# Altium PCB LVDS.PcbDoc
Units mil, origin at the board's own origin, x right, y up, seen from the top; angles counter-clockwise.
Board outline 6000 x 4000 mil, 2 copper layers (Top Layer, Bottom Layer); 41 components, 84 nets, 238 pads, 0 vias.
Unrouted connection lines stored in the file: 154.
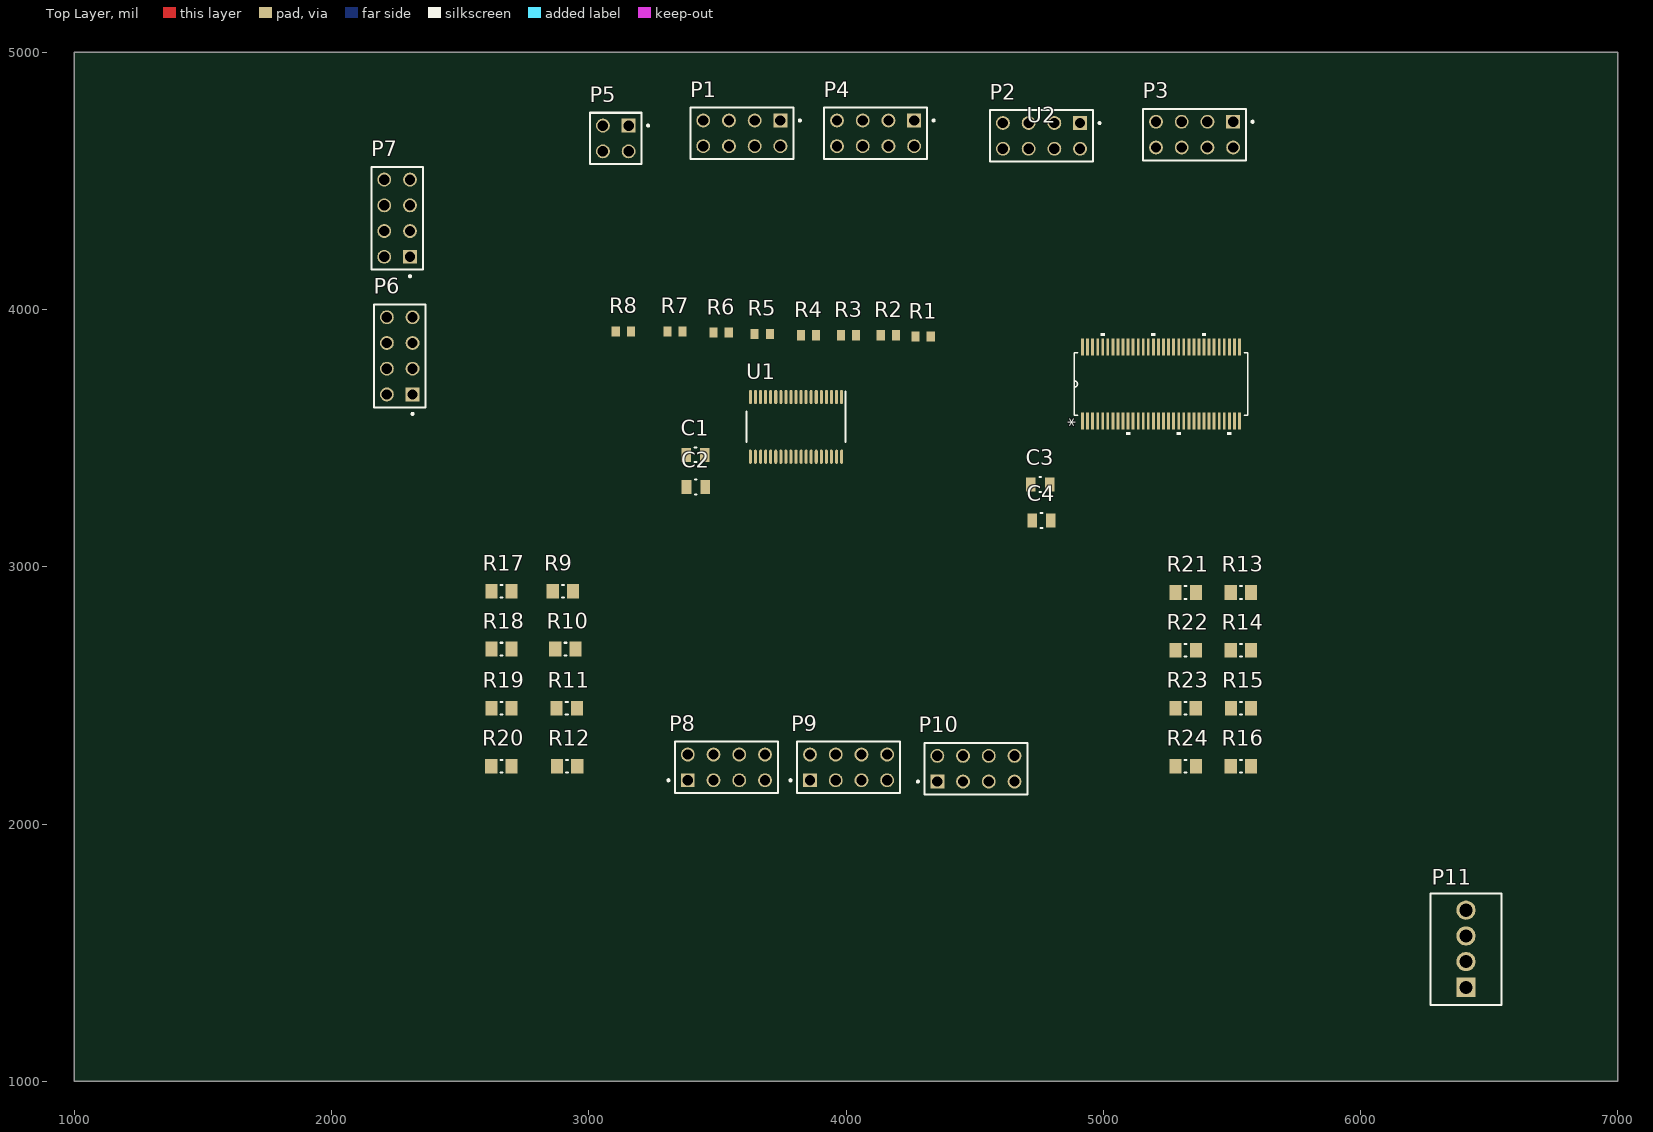
[diagram p0: Top Layer view]
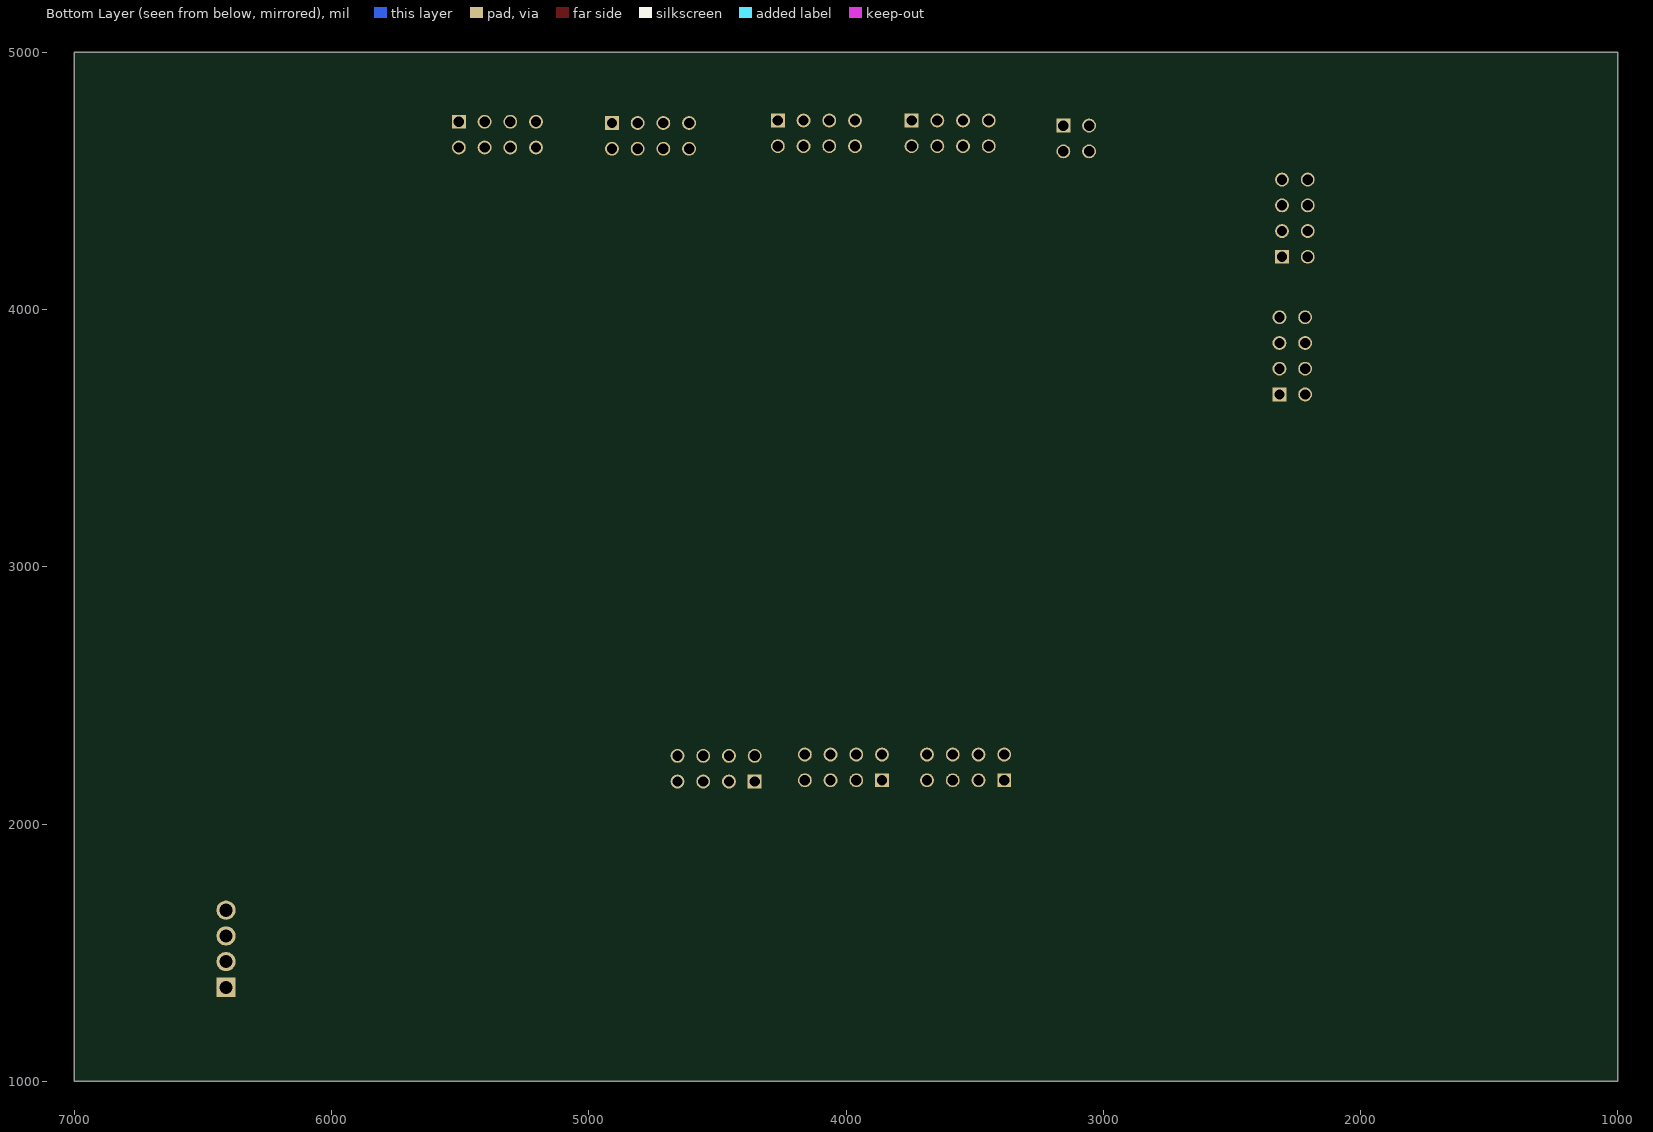
[diagram p1: Bottom Layer view, seen from below]

## Layer stack, top to bottom
Top Solder: solder mask 0.4, Solder Resist, Dk 3.5
Top Layer: signal copper 1.4
Dielectric 1: dielectric 12.6, FR-4, Dk 4.8
Bottom Layer: signal copper 1.4
Bottom Solder: solder mask 0.4, Solder Resist, Dk 3.5

## Board outline
1000,1000 7000,1000 7000,5000 1000,5000

## Design rules (kind name [scope] priority, off if disabled: settings)
Clearance [All] p1: gap=10 ignorepadtopadclearanceinfootprint=FALSE except(0: Arc-Hole Track-Hole SMDPad-Hole THPad-Hole Via-Hole Fill-Hole Poly-Hole Region-Hole Text-Hole)
DiffPairsRouting [All] p1: maxlimit=10 minlimit=10 mostfreqgap=10 toplayer_minwidth=15 toplayer_maxwidth=15 toplayer_prefwidth=15 bottomlayer_minwidth=15 bottomlayer_maxwidth=15 bottomlayer_prefwidth=15 maxuncoupledlength=500
PolygonConnect [All] p1: connectstyle=Relief reliefconductorwidth=10 reliefentries=4 polygonreliefangle="90 Angle" airgapwidth=10
RoutingVias [All] p1: holewidth=28 width=50 viastyle="Through Hole" minholewidth=28 minwidth=50 maxholewidth=28 maxwidth=50
SolderMaskExpansion [All] p1: expansion=4 istentingtop=FALSE
Width [All] p1: maxlimit=10 minlimit=10 preferedwidth=10
29 further rules are at their usual default settings.

## Classes and differential pairs
differential pair TRAN_4: +TRAN_4_P -TRAN_4_N
differential pair TRAN_3: +TRAN_3_P -TRAN_3_N
differential pair TRAN_2: +TRAN_2_P -TRAN_2_N
differential pair TRAN_1: +TRAN_1_P -TRAN_1_N
differential pair REC_4: +REC_4_P -REC_4_N
differential pair REC_3: +REC_3_P -REC_3_N
differential pair REC_2: +REC_2_P -REC_2_N
differential pair REC_1: +REC_1_P -REC_1_N
differential pair M4_SCLK: +M4_SCLK_P -M4_SCLK_N
differential pair M4_MOSI: +M4_MOSI_P -M4_MOSI_N
differential pair M4_MISO: +M4_MISO_P -M4_MISO_N
differential pair M4_CS: +M4_CS_P -M4_CS_N
differential pair M3_SCLK: +M3_SCLK_P -M3_SCLK_N
differential pair M3_MOSI: +M3_MOSI_P -M3_MOSI_N
differential pair M3_MISO: +M3_MISO_P -M3_MISO_N
differential pair M3_CS: +M3_CS_P -M3_CS_N
differential pair M2_SCLK: +M2_SCLK_P -M2_SCLK_N
differential pair M2_MOSI: +M2_MOSI_P -M2_MOSI_N
differential pair M2_MISO: +M2_MISO_P -M2_MISO_N
differential pair M2_CS: +M2_CS_P -M2_CS_N
differential pair M1_SCLK: +M1_SCLK_P -M1_SCLK_N
differential pair M1_MOSI: +M1_MOSI_P -M1_MOSI_N
differential pair M1_MISO: +M1_MISO_P -M1_MISO_N
differential pair M1_CS: +M1_CS_P -M1_CS_N

## Components (designator, comment, footprint, x,y, rotation, side; value= is the part's Value field where it differs from the comment)
C1 "CC0805MRX7R9BB104" FP-CC0805-0_85-MFG 3415,3435 r180 top value="100 nF"
C2 "CC0805KRX7R9BB102" FP-CC0805-0_85-MFG 3416.42,3310 r180 top value="1.0 nF"
C3 "CC0805MRX7R9BB104" FP-CC0805-0_85-MFG 4755,3320 r180 top value="100 nF"
C4 "CC0805KRX7R9BB102" FP-CC0805-0_85-MFG 4760,3180 r180 top value="1.0 nF"
P1 "TSW-104-07-F-D" SAMTEC_TSW-104-07-F-D 3595,4685 r180 top
P2 "TSW-104-07-F-D" SAMTEC_TSW-104-07-F-D 4760,4675 r180 top
P3 "TSW-104-07-F-D" SAMTEC_TSW-104-07-F-D 5355,4680 r180 top
P4 "TSW-104-07-F-D" SAMTEC_TSW-104-07-F-D 4115,4685 r180 top
P5 "0702871098" SAMTEC_MTSW-102-09-G-D-630 3155,4715 r180 top
P6 "TSW-104-07-F-D" SAMTEC_TSW-104-07-F-D 2265,3820 r90 top
P7 "TSW-104-07-F-D" SAMTEC_TSW-104-07-F-D 2255,4355 r90 top
P8 "TSW-104-07-F-D" SAMTEC_TSW-104-07-F-D 3535,2220 r0 top
P9 "TSW-104-07-F-D" SAMTEC_TSW-104-07-F-D 4010,2220 r0 top
P10 "TSW-104-07-F-D" SAMTEC_TSW-104-07-F-D 4505,2215 r0 top
P11 "OSTVN04A150" OSTVN04A150 6410,1365 r90 top
R1 "RC0603FR-07100RL" RESC1608X55X25ML10T15 4300,3895 r0 top
R2 "RC0603FR-07100RL" RESC1608X55X25ML10T15 4164.53,3900 r0 top
R3 "RC0603FR-07100RL" RESC1608X55X25ML10T15 4009.53,3900 r0 top
R4 "RC0603FR-07100RL" RESC1608X55X25ML10T15 3854.53,3900 r0 top
R5 "RC0603FR-07100RL" RESC1608X55X25ML10T15 3674.53,3905 r0 top
R6 "RC0603FR-07100RL" RESC1608X55X25ML10T15 3514.53,3910 r0 top
R7 "RC0603FR-07100RL" RESC1608X55X25ML10T15 3335,3915 r0 top
R8 "RC0603FR-07100RL" RESC1608X55X25ML10T15 3134.53,3915 r0 top
R9 "RC0805JR-070RL" RESC2013X60X35ML10T20 2899.37,2905 r0 top
R10 "RC0805JR-070RL" RESC2013X60X35ML10T20 2909.37,2680 r0 top
R11 "RC0805JR-070RL" RESC2013X60X35ML10T20 2914.37,2450 r0 top
R12 "RC0805JR-070RL" RESC2013X60X35ML10T20 2915.63,2225 r0 top
R13 "RC0805JR-070RL" RESC2013X60X35ML10T20 5535,2900 r0 top
R14 "RC0805JR-070RL" RESC2013X60X35ML10T20 5535,2675 r0 top
R15 "RC0805JR-070RL" RESC2013X60X35ML10T20 5535.63,2450 r0 top
R16 "RC0805JR-070RL" RESC2013X60X35ML10T20 5535,2225 r0 top
R17 "RC0805JR-070RL" RESC2013X60X35ML10T20 2660.63,2905 r0 top
R18 "RC0805JR-070RL" RESC2013X60X35ML10T20 2660.63,2680 r0 top
R19 "RC0805JR-070RL" RESC2013X60X35ML10T20 2660.63,2450 r0 top
R20 "RC0805JR-070RL" RESC2013X60X35ML10T20 2660,2225 r0 top
R21 "RC0805JR-070RL" RESC2013X60X35ML10T20 5320.63,2900 r0 top
R22 "RC0805JR-070RL" RESC2013X60X35ML10T20 5320.63,2675 r0 top
R23 "RC0805JR-070RL" RESC2013X60X35ML10T20 5320,2450 r0 top
R24 "RC0805JR-070RL" RESC2013X60X35ML10T20 5320.63,2225 r0 top
U1 "SN65LVDS388ADBT" DBT0038A_N 3805.63,3543.86 r270 top
U2 "SN75LVDS387DGG" DGG64 5224.53,3710.5 r90 top

## Footprints (in the part's own frame and the unit in brackets; to place one, negate y for a bottom-side part, rotate by r counter-clockwise, add the part's x,y. Pads: shape width x height; smd on the part's side, far side on the other; paste and mask are expansions set on the pad)
DBT0038A_N [mm]
  oval 1.4x0.3 smd paste+0 mask+0: 1(-2.95,4.5) 2(-2.95,4) 3(-2.95,3.5) 4(-2.95,3) 5(-2.95,2.5) 6(-2.95,2) 7(-2.95,1.5) 8(-2.95,1) 9(-2.95,0.5) 10(-2.95,0) 11(-2.95,-0.5) 12(-2.95,-1) 13(-2.95,-1.5) 14(-2.95,-2) 15(-2.95,-2.5) 16(-2.95,-3) 17(-2.95,-3.5) 18(-2.95,-4) 19(-2.95,-4.5) 20(2.95,-4.5) 21(2.95,-4) 22(2.95,-3.5) 23(2.95,-3) 24(2.95,-2.5) 25(2.95,-2) 26(2.95,-1.5) 27(2.95,-1) 28(2.95,-0.5) 29(2.95,0) 30(2.95,0.5) 31(2.95,1) 32(2.95,1.5) 33(2.95,2) 34(2.95,2.5) 35(2.95,3) 36(2.95,3.5) 37(2.95,4) 38(2.95,4.5)
  silkscreen extent -3.5,-4.9 1.5,4.9, body extent -3.2,-4.85 3.2,4.85, height 1.13
DGG64 [mil]
  rect 66x11 smd: 1(-144.5,305.12) 2(-144.5,285.43) 3(-144.5,265.75) 4(-144.5,246.06) 5(-144.5,226.38) 6(-144.5,206.69) 7(-144.5,187.01) 8(-144.5,167.32) 9(-144.5,147.64) 10(-144.5,127.95) 11(-144.5,108.27) 12(-144.5,88.58) 13(-144.5,68.9) 14(-144.5,49.21) 15(-144.5,29.53) 16(-144.5,9.84) 17(-144.5,-9.84) 18(-144.5,-29.53) 19(-144.5,-49.21) 20(-144.5,-68.9) 21(-144.5,-88.58) 22(-144.5,-108.27) 23(-144.5,-127.95) 24(-144.5,-147.64) 25(-144.5,-167.32) 26(-144.5,-187.01) 27(-144.5,-206.69) 28(-144.5,-226.38) 29(-144.5,-246.06) 30(-144.5,-265.75) 31(-144.5,-285.43) 32(-144.5,-305.12) 33(144.5,-305.12) 34(144.5,-285.43) 35(144.5,-265.75) 36(144.5,-246.06) 37(144.5,-226.38) 38(144.5,-206.69) 39(144.5,-187.01) 40(144.5,-167.32) 41(144.5,-147.64) 42(144.5,-127.95) 43(144.5,-108.27) 44(144.5,-88.58) 45(144.5,-68.9) 46(144.5,-49.21) 47(144.5,-29.53) 48(144.5,-9.84) 49(144.5,9.84) 50(144.5,29.53) 51(144.5,49.21) 52(144.5,68.9) 53(144.5,88.58) 54(144.5,108.27) 55(144.5,127.95) 56(144.5,147.64) 57(144.5,167.32) 58(144.5,187.01) 59(144.5,206.69) 60(144.5,226.38) 61(144.5,246.06) 62(144.5,265.75) 63(144.5,285.43) 64(144.5,305.12)
  silkscreen extent -198,-336 198,336, body extent -164,-336 164,337, height 47
FP-CC0805-0_85-MFG [mm]
  rect 0.95x1.4 smd paste+0 mask+0: 1(-0.925,0) 2(0.925,0)
  silkscreen extent -0.08,-0.72 0.08,0.72, body extent -1.6,-1.05 1.6,1.05, height 0.25
OSTVN04A150 [mm] "4 Position Wire to Board Terminal Block Horizontal with Board 0.100\" (2.54mm) Through Hole"
  rect 1.9x1.9 hole 1.3: 1(0,0)
  round 1.9 hole 1.3: 2(2.54,0) 3(5.08,0) 4(7.62,0)
  silkscreen extent -1.75,-3.5 9.25,3.5, body extent -1.47,-3.25 9.09,3.25, height 8.65
RESC1608X55X25ML10T15 [mm] "Chip Resistor, 2-Leads, Body 1.60x0.80mm, IPC Low Density"
  rect 0.8x1 smd: 1(-0.75,0) 2(0.75,0)
  body extent -0.85,-0.45 0.85,0.45, height 0.55
RESC2013X60X35ML10T20 [mm] "Chip Resistor, 2-Leads, Body 2.1x1.35mm, IPC Low Density"
  rect 1.2x1.45 smd: 1(-1,0) 2(1,0)
  silkscreen extent -0.1,-0.63 0.1,0.63, body extent -1.05,-0.68 1.05,0.67, height 0.6
SAMTEC_MTSW-102-09-G-D-630 [mm]
  rect 1.37x1.37 hole 1.02: 1(0,0)
  round 1.37 hole 1.02: 2(0,2.54) 3(2.54,0) 4(2.54,2.54)
  silkscreen extent -2.02,-1.27 3.81,3.81
SAMTEC_TSW-104-07-F-D [mm]
  rect 1.37x1.37 hole 1.02: 1(-3.81,-1.27)
  round 1.37 hole 1.02: 2(-3.81,1.27) 3(-1.27,-1.27) 4(-1.27,1.27) 5(1.27,-1.27) 6(1.27,1.27) 7(3.81,-1.27) 8(3.81,1.27)
  silkscreen extent -5.83,-2.54 5.08,2.54

## Part data
C1 C3: library part CMP-03422-000633-1, "CAP CER 0.1UF 50V X7R 0805", Capacitance="100 nF", Manufacturer=Yageo, Package=CC0805-0.85, Temperature="-30°C to +85°C", Temperature Characteristic=X7R, Temperature Range High=+85°C, Temperature Range Low=-30°C, Tolerance=0.2, Voltage Rating="50 V", Automotive=No, Category=Cap, ComponentLink2Description=Datasheet, ComponentLink2URL=http://www.yageo.com/documents/recent/UPY-GPHC_Y5V_6.3V-to-50V_8.pdf, Device Class L1="Passive Components", Device Class L2=Capacitors, Device Class L3="Ceramic Capacitors", Digikey Description="CAP CER 0.1UF 50V X7R 0805", Footprint Url=http://www.yageo.com/exep/pages/download/literatures/UPY-C_GEN_24.pdf, Height=0.95mm, Ipc Land Pattern Name=CAPC200125X85, Lead Free=Yes, Manufacturer Part Number=CC0805MRX7R9BB104, Material=Ceramic, Mouser Description="Multilayer Ceramic Capacitors MLCC - SMD/SMT 100nF 50V X7R 20%", Octopart=https://octopart.com/cc0805mrx7r9bb104-yageo-30261726, RoHS=TRUE
C2 C4: library part CMP-1036-02978-3, "CAP CER 1000PF 50V X7R 0805", Capacitance="1.0 nF", Manufacturer=Yageo, Package=CC0805-0.85, Temperature="-30°C to +85°C", Temperature Characteristic=X7R, Temperature Range High=+85°C, Temperature Range Low=-30°C, Tolerance=0.1, Voltage Rating="50 V", Automotive=No, Category=Cap, ComponentLink2Description=Datasheet, ComponentLink2URL=http://www.yageo.com/documents/recent/UPY-GPHC_Y5V_6.3V-to-50V_8.pdf, Device Class L1="Passive Components", Device Class L2=Capacitors, Device Class L3="Ceramic Capacitors", Digikey Description="CAP CER 1000PF 50V X7R 0805", Footprint Url=http://www.yageo.com/exep/pages/download/literatures/UPY-C_GEN_24.pdf, Height=0.95mm, Ipc Land Pattern Name=CAPC200125X85, Lead Free=Yes, Manufacturer Part Number=CC0805KRX7R9BB102, Material=Ceramic, Mouser Description="Multilayer Ceramic Capacitors MLCC - SMD/SMT 1.0nF 50V X7R 10%", Octopart=https://octopart.com/cc0805krx7r9bb102-yageo-39467744, RoHS=TRUE
P1 P2 P3 P4 P6 P7 P8 P9 P10: "Board Connector, 8 Contact(s), 2 Row(s), Male, Straight, 0.1 inch Pitch, Solder Terminal, Black Insulator", Flammability Rating="UL94 V-0", Insulation Color=Black, Manufacturer=Samtec, Additional Feature=E.L.P., Body Breadth=0.1inch, Body Depth=0.1inch, Body/Shell Style=RECEPTACLE, Category=Connectors, ComponentLink1Description=https://datasheet.ciiva.com:443/pdfs/VipMasterIC/IC/SAMI/SAMI-S-A0003531373/SAMI-S-A0003531373-1.pdf?src-supplier=IHS+Markit, ComponentLink1URL=https://datasheet.ciiva.com:443/pdfs/VipMasterIC/IC/SAMI/SAMI-S-A0003531373/SAMI-S-A0003531373-1.pdf?src-supplier=IHS+Markit, ComponentLink2Description=https://datasheet.ciiva.com/739/tsw-xxx-xx-xxx-x-xx-xxx-mkt-739906.pdf?src-supplier=Digi-Key, ComponentLink2URL=https://datasheet.ciiva.com/739/tsw-xxx-xx-xxx-x-xx-xxx-mkt-739906.pdf?src-supplier=Digi-Key, Connector Type="BOARD CONNECTOR", Contact Finish - Mating="GOLD FLASH OVER NICKEL (50)", Contact Finish - Termination="Matte Tin (Sn) - with Nickel (Ni) barrier", Contact Gender=Male, Contact Material=Bronze, Contact Pattern=RECTANGULAR, Contact Style="SQ PIN-SKT", DIN Conformance=No, Filter Feature=No, IEC Conformance=No, Insulation Material=Glass, JESD-609 Code=e3, Manufacturer Part Number=TSW-104-07-F-D, Mating Contact Pitch=0.1inch, Mating Contact Row Spacing=0.1inch, Mating Information="MULTIPLE MATING PARTS AVAILABLE", MIL Conformance=No, Mixed Contacts=No, Mounting Style=STRAIGHT, Mounting Technology=Board, Number Of Connectors=1, Number Of Contacts=8, Number Of PCB Rows=2, Number of Rows Loaded=2, Option="General Purpose", PCB Contact Pattern=RECTANGULAR, PCB Contact Row Spacing=5.08mm, Pricing="1=0.9123, 50=0.706, 100=0.5756 (USD)", Reach SVHC Compliant=Yes, Reference Standard=UL, Reliability=COMMERCIAL, RoHS=Yes, RoHS Compliant=Yes, Stock=1, Supplier="Arrow Electronics", Supplier Part Number=TSW-104-07-F-D, Terminal Length=0.1inch, Terminal Pitch=2.54mm, Termination=Solder
P5: "Conn Unshrouded Header HDR 4 POS 2.54mm Solder ST Thru-Hole C-Grid® Bag", Manufacturer=Molex, Supplier Part Number=538-70287-1098, Category=Uncategorized, ComponentLink1Description=https://datasheet.ciiva.com:443/pdfs/VipMasterIC/IC/MOLE/MOLE-S-A0008016477/MOLE-S-A0006766117-1.pdf?src-supplier=IHS+Markit, ComponentLink1URL=https://datasheet.ciiva.com:443/pdfs/VipMasterIC/IC/MOLE/MOLE-S-A0008016477/MOLE-S-A0006766117-1.pdf?src-supplier=IHS+Markit, ComponentLink2Description=https://datasheet.ciiva.com/9470/0702871098-pcb-headers-9470347.pdf?src-supplier=Avnet, ComponentLink2URL=https://datasheet.ciiva.com/9470/0702871098-pcb-headers-9470347.pdf?src-supplier=Avnet, ComponentLink3Description=https://datasheet.ciiva.com/2961/702871098-sd-2961361.pdf?src-supplier=Digi-Key, ComponentLink3URL=https://datasheet.ciiva.com/2961/702871098-sd-2961361.pdf?src-supplier=Digi-Key, Manufacturer Part Number=0702871098, Pricing="1=0.53, 10=0.448, 50=0.448, 100=0.349, 1000=0.274, 10000=0.221 (USD)", Reach SVHC Compliant=Yes, RoHS=Yes, RoHS Compliant=Yes, Stock=14353, Supplier=Mouser
P11: "Barrier Strip Terminal Block, 6A, 1 Row(s), 1 Deck(s)", Current Rating=6A, Manufacturer="On-Shore Technology", Supplier Part Number=ED10563-ND, Voltage Rating=125V, Additional Feature="STANDARD: UL 94V-0, THERMOPLASTIC", Category="Terminal Blocks", ComponentLink1Description=https://datasheet.ciiva.com:443/pdfs/VipMasterIC/IC/ONST/ONSTS00240/ONSTS00114-1.pdf?src-supplier=IHS+Markit, ComponentLink1URL=https://datasheet.ciiva.com:443/pdfs/VipMasterIC/IC/ONST/ONSTS00240/ONSTS00114-1.pdf?src-supplier=IHS+Markit, ComponentLink2Description=https://datasheet.ciiva.com/823/ostvnxxa150-823966.pdf?src-supplier=Digi-Key, ComponentLink2URL=https://datasheet.ciiva.com/823/ostvnxxa150-823966.pdf?src-supplier=Digi-Key, Fastening Method=SCREW, Manufacturer Part Number=OSTVN04A150, Mounting Technology=Board, Number of Decks=1, Number Of Rows=1, Number of Ways=4, Pricing="1=1.39, 10=0.979, 25=0.9128, 50=0.8286, 100=0.8249, 250=0.6966, 500=0.65994, 1000=0.58661, 5000=0.47662 (USD)", Reach SVHC Compliant=Yes, RoHS=Yes, RoHS Compliant=Yes, Safety Approval=UL,CUL, Stock=3152, Supplier=Digi-Key, Terminal and Terminal Block Type="BARRIER STRIP TERMINAL BLOCK", Wire/Cable Gauge=20AWG
R1 R2 R3 R4 R5 R6 R7 R8: library part CMP-2100-03663-1, "Chip Resistor, 100 Ohm, +/- 1%, 0.1 W, -55 to 155 degC, 0603 (1608 Metric), RoHS, Tape and Reel", Case Code (Imperial)=0603, Case Code (Metric)=1608, Manufacturer=Yageo, Max Operating Temperature=155degC, Min Operating Temperature=-55degC, Package Description="2-Pin Surface Mount Device, Body 1.6 x 0.8 mm", Power Rating=100mW, Resistance=100Ohm, Temperature Coefficient=100ppm/degreesC, Tolerance=1%, Voltage Rating=50V, Case/Package=0603, Composition=ThickFilm, Datasheet URL=http://www.yageo.com/NewPortal/yageodocoutput?fileName=/pdf/R-Chip/PYu-RC_Group_51_RoHS_L_5.pdf, Datasheet Version="Rev. 5, 10/2016", Depth=0.8mm, Height=0.45mm, Lead Free=LeadFree, Length=1.6mm, Manufacturer URL=http://www.yageo.com/, Military Standard=Not, Number of Pins=2, Package Reference=0603, Packaging=TapeandReel, REACH SVHC=Unknown, RoHSCompliant=true, Termination=SMD/SMT, Voltage Rating (DC)=50V, Width=0.8mm
R9 R10 R11 R12 R13 R14 R15 R16 R17 R18 R19 R20 R21 R22 R23 R24: library part CMP-2100-03673-1, "Chip Resistor, 0 Ohm, Jumper, +/- 5%, 0.125 W, -55 to 155 degC, 0805 (2012 Metric), RoHS, Tape and Reel", Case Code (Imperial)=0805, Case Code (Metric)=2012, Manufacturer=Yageo, Max Operating Temperature=155degC, Min Operating Temperature=-55degC, Package Description="2-Pin Surface Mounted Device, Body 2 x 1.25 mm", Power Rating=125mW, Resistance=0mOhm, Temperature Coefficient=200ppm/degreesC, Tolerance=5%, Voltage Rating=150V, Case/Package=0805, Composition=ThickFilm, Contact Plating=Tin, Datasheet URL=http://www.yageo.com/NewPortal/yageodocoutput?fileName=/pdf/R-Chip/PYu-RC_Group_51_RoHS_L_5.pdf, Datasheet Version="Rev. 5, 10/2016", Depth=1.25mm, Height=0.5mm, Lead Free=LeadFree, Length=2mm, Manufacturer URL=http://www.yageo.com/, Military Standard=Not, Number of Pins=2, Package Reference=0805, Packaging=TapeandReel, Radiation Hardening=No, REACH SVHC=Unknown, RoHSCompliant=true, Termination=SMD/SMT, Voltage Rating (DC)=150V, Width=1.25mm
U1: "Line Receiver, 8 Func, 8 Rcvr, CMOS, PDSO38", Case/Package=TSSOP, Manufacturer="Texas Instruments", Max Operating Temperature=85°C, Max Supply Current=40mA, Max Supply Voltage=3.6V, Min Operating Temperature=-40°C, Min Supply Voltage=3V, Nominal Supply Voltage=3.3V, Output Low Current-Max=8mA, Package Body Material=Plastic, Package Shape=Rectangular, Package Style="SMALL OUTLINE, THIN PROFILE, SHRINK PITCHMeter", Peak Reflow Temperature (Cel)=260°C, Supplier Part Number=296-6926-5-ND, Temperature Grade=INDUSTRIAL, Category="Interface ICs", Channels=8, ComponentLink1Description=https://www.ti.com:443/lit/ds/symlink/sn65lvds386.pdf?src-supplier=IHS+Markit, ComponentLink1URL=https://www.ti.com:443/lit/ds/symlink/sn65lvds386.pdf?src-supplier=IHS+Markit, ComponentLink2Description=https://datasheet.ciiva.com/1708/sn65lvds386-1708540.pdf?src-supplier=Digi-Key, ComponentLink2URL=https://datasheet.ciiva.com/1708/sn65lvds386-1708540.pdf?src-supplier=Digi-Key, ComponentLink3Description=https://datasheet.ciiva.com/3151/sn65lvds390-3151563.pdf?src-supplier=Avnet, ComponentLink3URL=https://datasheet.ciiva.com/3151/sn65lvds390-3151563.pdf?src-supplier=Avnet, ComponentLink4Description=https://datasheet.ciiva.com/15151/getdatasheetpartid-43449-15151030.pdf?src-supplier=Verical, ComponentLink4URL=https://datasheet.ciiva.com/15151/getdatasheetpartid-43449-15151030.pdf?src-supplier=Verical, ComponentLink5Description=https://datasheet.ciiva.com/1498/1831133-1498284.pdf?src-supplier=Element14, ComponentLink5URL=https://datasheet.ciiva.com/1498/1831133-1498284.pdf?src-supplier=Element14, Differential Output=No, Height - Seated (Max)=1.2mm, Input Characteristics=DIFFERENTIAL, Interface IC Type="LINE RECEIVER", JESD-609 Code=e4, Length=9.7mm, Manufacturer Part Number=SN65LVDS388ADBT, Moisture Sensitivity Level=2, Pins=38, Power Supplies=3.3V, Pricing="1=6, 10=5.393, 25=5.0984, 100=4.4187, 250=4.19208, 500=3.76156, 1000=3.1724, 2500=3.01378 (USD)", Qualification Status="Not Qualified", Reach SVHC Compliant=Yes, Receive Delay-Max=4ns, Receiver Number of Bits=8, RoHS=Yes, RoHS Compliant=Yes, Stock=22, Supplier=Digi-Key, Surface Mount=Yes, Technology=CMOS, Terminal Finish=Nickel, Terminal Form="Gull Wing", Terminal Pitch=0.5mm, Terminal Position=DUAL, Width=4.4mm
U2: "Line Driver, 16 Func, 16 Driver, CMOS, PDSO64", Case/Package=TSSOP, High Level Input Current-Max=20uA, Manufacturer="Texas Instruments", Max Operating Temperature=70°C, Max Supply Voltage=3.6V, Min Operating Temperature=0°C, Min Supply Voltage=3V, Nominal Supply Voltage=3.3V, Package Body Material=Plastic, Package Shape=Rectangular, Package Style="SMALL OUTLINE, THIN PROFILE, SHRINK PITCHMeter", Peak Reflow Temperature (Cel)=260°C, Supplier Part Number=296-2367-5-ND, Temperature Grade=COMMERCIAL, Category="Interface ICs", Channels=16, ComponentLink1Description=https://www.ti.com:443/lit/ds/symlink/sn65lvds387.pdf?src-supplier=IHS+Markit, ComponentLink1URL=https://www.ti.com:443/lit/ds/symlink/sn65lvds387.pdf?src-supplier=IHS+Markit, ComponentLink2Description=https://datasheet.ciiva.com/3151/sn75lvds389-3151600.pdf?src-supplier=Avnet, ComponentLink2URL=https://datasheet.ciiva.com/3151/sn75lvds389-3151600.pdf?src-supplier=Avnet, ComponentLink3Description=https://datasheet.ciiva.com/1709/sn65lvds387-1709399.pdf?src-supplier=Digi-Key, ComponentLink3URL=https://datasheet.ciiva.com/1709/sn65lvds387-1709399.pdf?src-supplier=Digi-Key, ComponentLink4Description=https://datasheet.ciiva.com/1498/668195-1498817.pdf?src-supplier=Element14, ComponentLink4URL=https://datasheet.ciiva.com/1498/668195-1498817.pdf?src-supplier=Element14, Differential Output=Yes, Driver Number of Bits=16, Height - Seated (Max)=1.2mm, Input Characteristics=STANDARD, Interface IC Type="LINE DRIVER", JESD-609 Code=e4, Length=17mm, Manufacturer Part Number=SN75LVDS387DGG, Moisture Sensitivity Level=2, Out Swing-Min=247mV, Output Characteristics=3-STATE, Pins=64, Power Supplies=3.3V, Pricing="1=12.08, 10=10.913, 25=10.4056, 100=9.035, 250=8.62892, 500=7.86756, 1000=6.85238 (USD)", Qualification Status="Not Qualified", Reach SVHC Compliant=Yes, Receive Delay-Max=0ns, RoHS=Yes, RoHS Compliant=Yes, Stock=664, Supplier=Digi-Key, Surface Mount=Yes, Technology=CMOS, Terminal Finish=Nickel, Terminal Form="Gull Wing", Terminal Pitch=0.5mm, Terminal Position=DUAL, Transmit Delay-Max=2.9ns, Width=6.1mm

## Nets (pads, with @x,y where several pads share a name; then routed paths per layer and width w, separated by ;. In a path a pad name is that pad's centre, name@x,y a point inside that pad or via, vN(x,y) a via of type N, cw(c..) or ccw(c..) an arc to the next point about the centre after c; other vN are vias at no path point)
GND: C1.2 C2.2 C3.2 C4.2 P5.3 P11.2 R17.1 R18.1 R19.1 R20.1 R21.1 R22.1 R23.1 R24.1 U1.5 U1.10 U1.15 U1.20 U1.28 U1.30 U1.38 U2.1 U2.4 U2.15 U2.18 U2.29 U2.32
M1_CS: P8.1 U2.6
M1_CS_N: P1.5 U2.63
M1_CS_P: P1.1 U2.64
M1_MISO: P8.4 U1.35
M1_MISO_N: P1.8 R1.1 U1.2
M1_MISO_P: P1.4 R1.2 U1.1
M1_MOSI: P8.3 U2.8
M1_MOSI_N: P1.7 U2.59
M1_MOSI_P: P1.3 U2.60
M1_SCLK: P8.2 U2.7
M1_SCLK_N: P1.6 U2.61
M1_SCLK_P: P1.2 U2.62
M2_CS: P8.5 U2.9
M2_CS_N: P2.5 U2.57
M2_CS_P: P2.1 U2.58
M2_MISO: P8.8 U1.34
M2_MISO_N: P2.8 R2.1 U1.4
M2_MISO_P: P2.4 R2.2 U1.3
M2_MOSI: P8.7 U2.12
M2_MOSI_N: P2.7 U2.53
M2_MOSI_P: P2.3 U2.54
M2_SCLK: P8.6 U2.11
M2_SCLK_N: P2.6 U2.55
M2_SCLK_P: P2.2 U2.56
M3_CS: P9.1 U2.13
M3_CS_N: P3.5 U2.51
M3_CS_P: P3.1 U2.52
M3_MISO: P9.4 U1.32
M3_MISO_N: P3.8 R3.1 U1.7
M3_MISO_P: P3.4 R3.2 U1.6
M3_MOSI: P9.3 U2.19
M3_MOSI_N: P3.7 U2.47
M3_MOSI_P: P3.3 U2.48
M3_SCLK: P9.2 U2.14
M3_SCLK_N: P3.6 U2.49
M3_SCLK_P: P3.2 U2.50
M4_CS: P9.5 U2.20
M4_CS_N: P4.5 U2.45
M4_CS_P: P4.1 U2.46
M4_MISO: P9.8 U1.31
M4_MISO_N: P4.8 R4.1 U1.9
M4_MISO_P: P4.4 R4.2 U1.8
M4_MOSI: P9.7 U2.22
M4_MOSI_N: P4.7 U2.41
M4_MOSI_P: P4.3 U2.42
M4_SCLK: P9.6 U2.21
M4_SCLK_N: P4.6 U2.43
M4_SCLK_P: P4.2 U2.44
REC_1: P10.5 U1.27
REC_1_N: P7.5 R5.1 U1.12
REC_1_P: P7.1 R5.2 U1.11
REC_2: P10.6 U1.26
REC_2_N: P7.6 R6.1 U1.14
REC_2_P: P7.2 R6.2 U1.13
REC_3: P10.7 U1.24
REC_3_N: P7.7 R7.1 U1.17
REC_3_P: P7.3 R7.2 U1.16
REC_4: P10.8 U1.23
REC_4_N: P7.8 R8.1 U1.19
REC_4_P: P7.4 R8.2 U1.18
SN65_ENA: R9.1 R17.2 U1.36
SN65_ENB: R10.1 R18.2 U1.33
SN65_ENC: R11.1 R19.2 U1.25
SN65_END: R12.1 R20.2 R24.2 U1.22
SN75_ENA: R13.1 R21.2 U2.5
SN75_ENB: R14.1 R22.2 U2.10
SN75_ENC: R15.1 R23.2 U2.23
SN75_END: R16.1 U2.28
TRAN_1: P10.1 U2.24
TRAN_1_N: P6.5 U2.39
TRAN_1_P: P6.1 U2.40
TRAN_2: P10.2 U2.25
TRAN_2_N: P6.6 U2.37
TRAN_2_P: P6.2 U2.38
TRAN_3: P10.3 U2.26
TRAN_3_N: P6.7 U2.35
TRAN_3_P: P6.3 U2.36
TRAN_4: P10.4 U2.27
TRAN_4_N: P6.8 U2.33
TRAN_4_P: P6.4 U2.34
VDD: C1.1 C2.1 C3.1 C4.1 P5.1 P11.1 R9.2 R10.2 R11.2 R12.2 R13.2 R14.2 R15.2 R16.2 U1.21 U1.29 U1.37 U2.2 U2.3 U2.16 U2.17 U2.30 U2.31
VSTIM+: P5.4 P11.3
VSTIM-: P5.2 P11.4

## Text inside footprints (layer, text, board x,y; h text height)
U2: Top 3D Body "*" at 4913.41,3543.5 h50 r90; Top Overlay "*" at 4913.41,3543.5 h50 r90; Mechanical 7 "1.968504E-02in/.5mm" at 4941.75,3208.5 h25 r90; Mechanical 7 "Alt 2 Padstyle: OX90Y60D30P" at 5986.03,3373 h50 r90; Mechanical 7 "Alt 1 Padstyle: OX60Y90D30P" at 5911.03,3373 h50 r90; Mechanical 7 "Pin One Padstyle: RX66Y11D0T" at 5836.03,3360.5 h50 r90; Mechanical 7 "Default Padstyle: RX66Y11D0T" at 5761.03,3360.5 h50 r90